# Altium PCB de10ext.PcbDoc
Units mm, origin at the board's own origin, x right, y up, seen from the top; angles counter-clockwise.
Board outline 120.47 x 75.46 mm, 4 copper layers (Sig/Pwr-1, Gnd-2, Gnd-3, Sig/Pwr-4), stack 1.57 mm thick; 81 components, 72 nets, 303 pads, 142 vias.
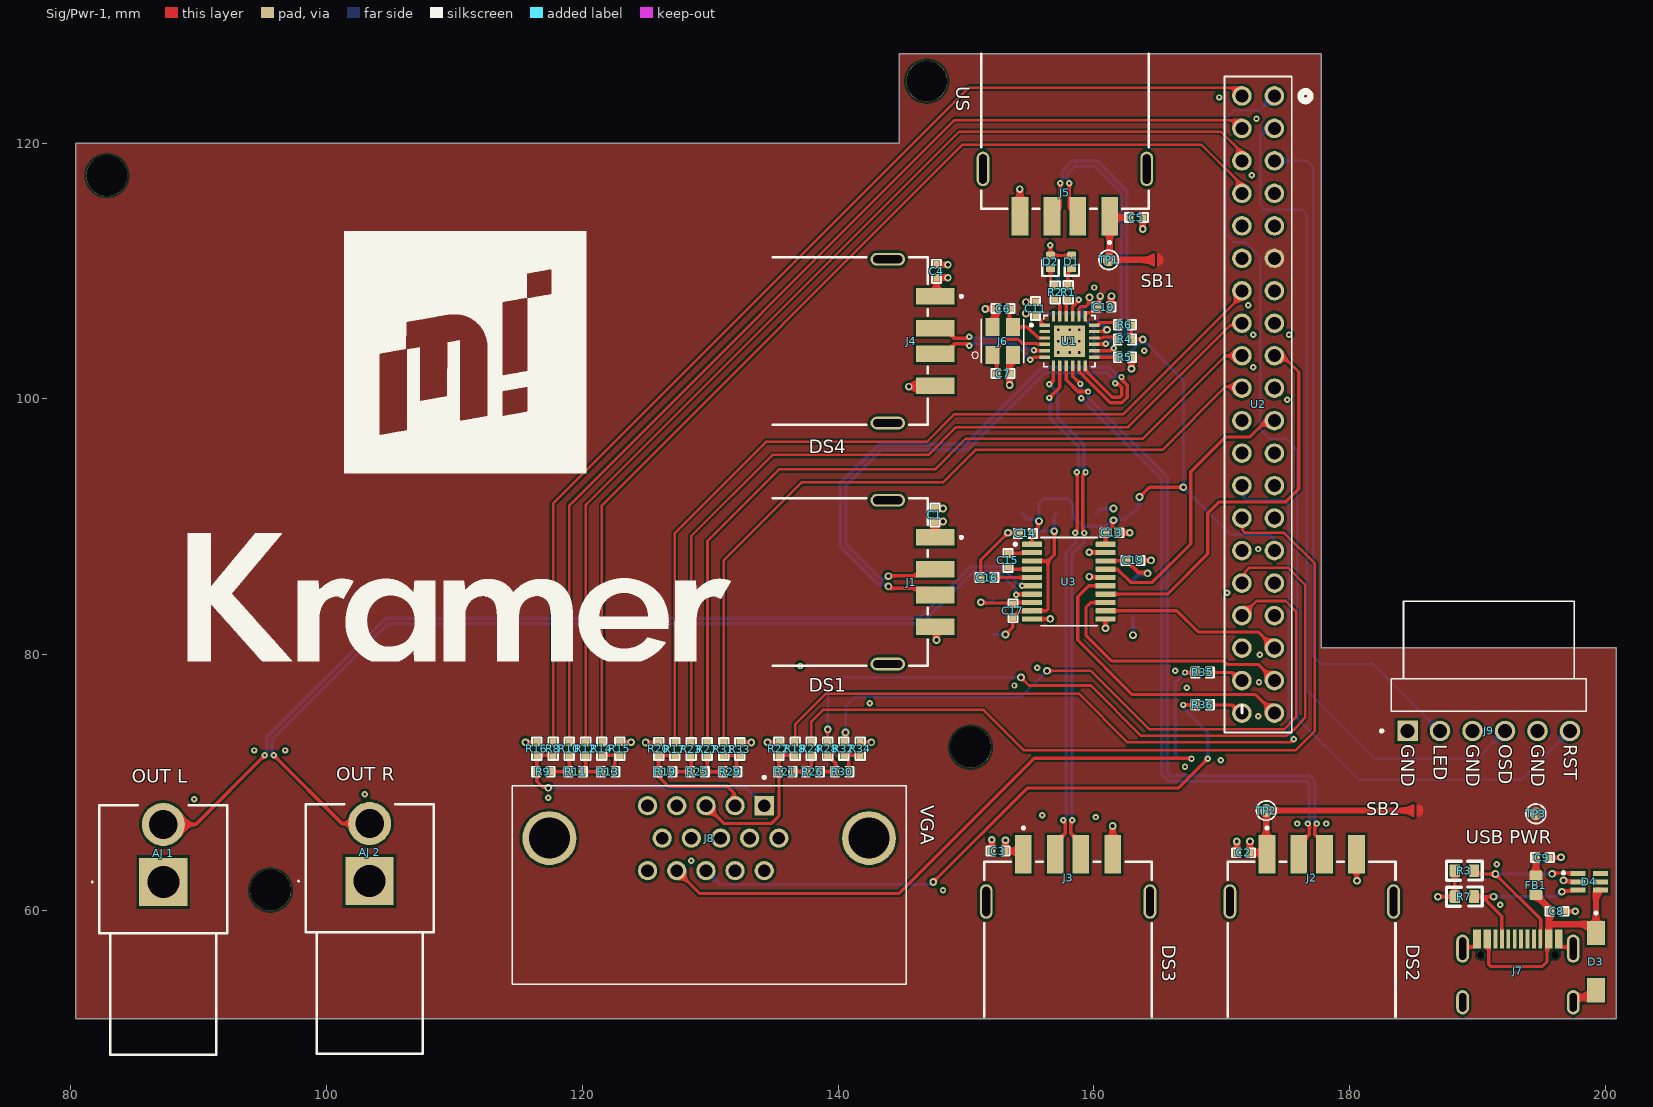
[diagram p0: Sig/Pwr-1 view]
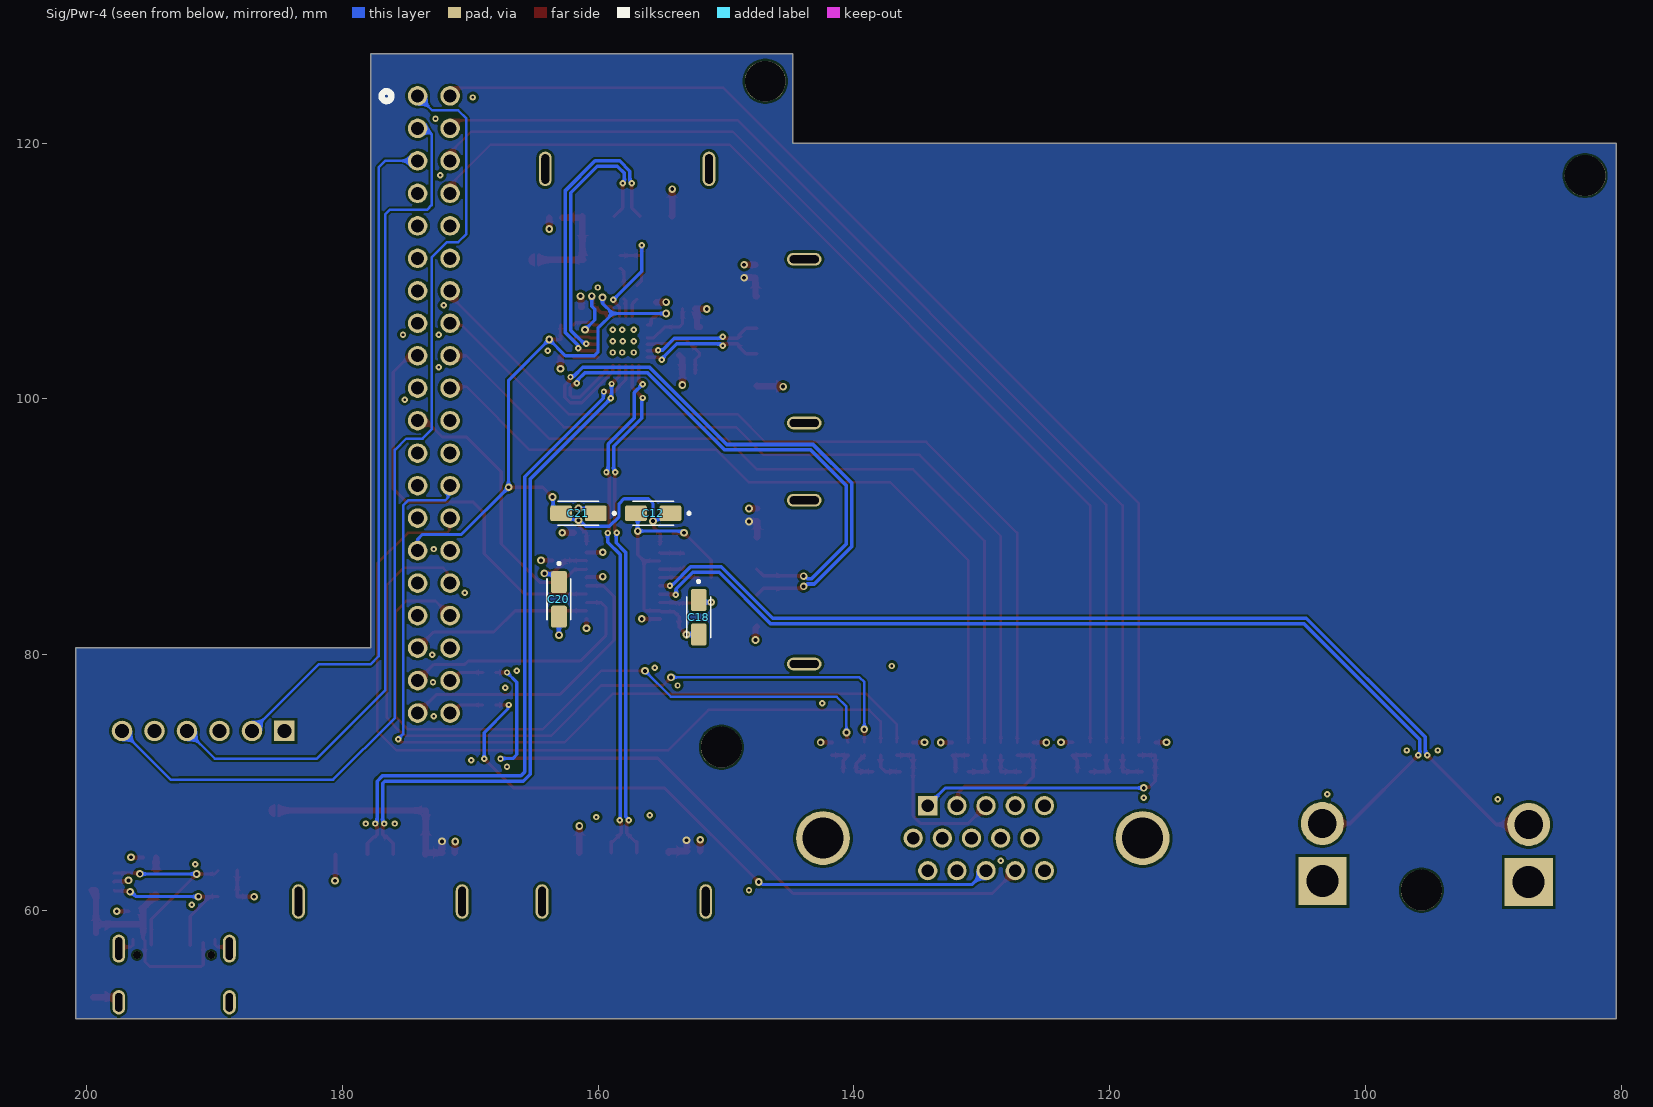
[diagram p1: Sig/Pwr-4 view, seen from below]
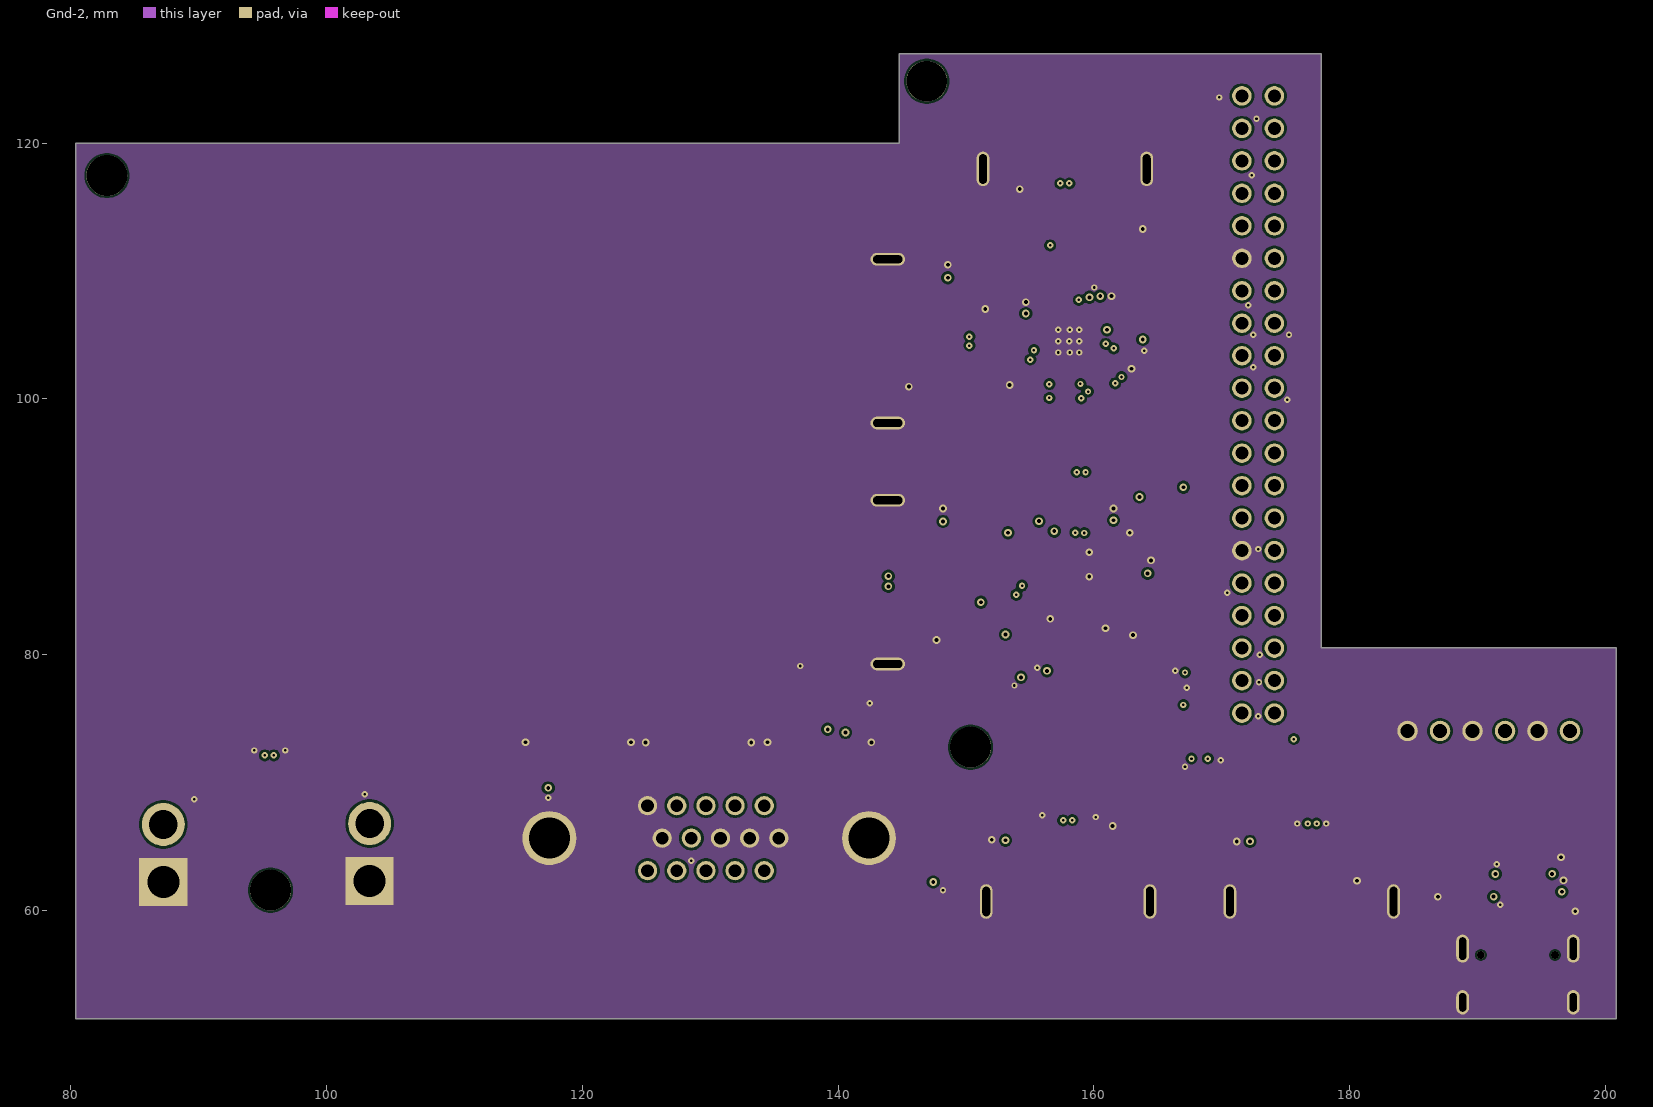
[diagram p2: Gnd-2]
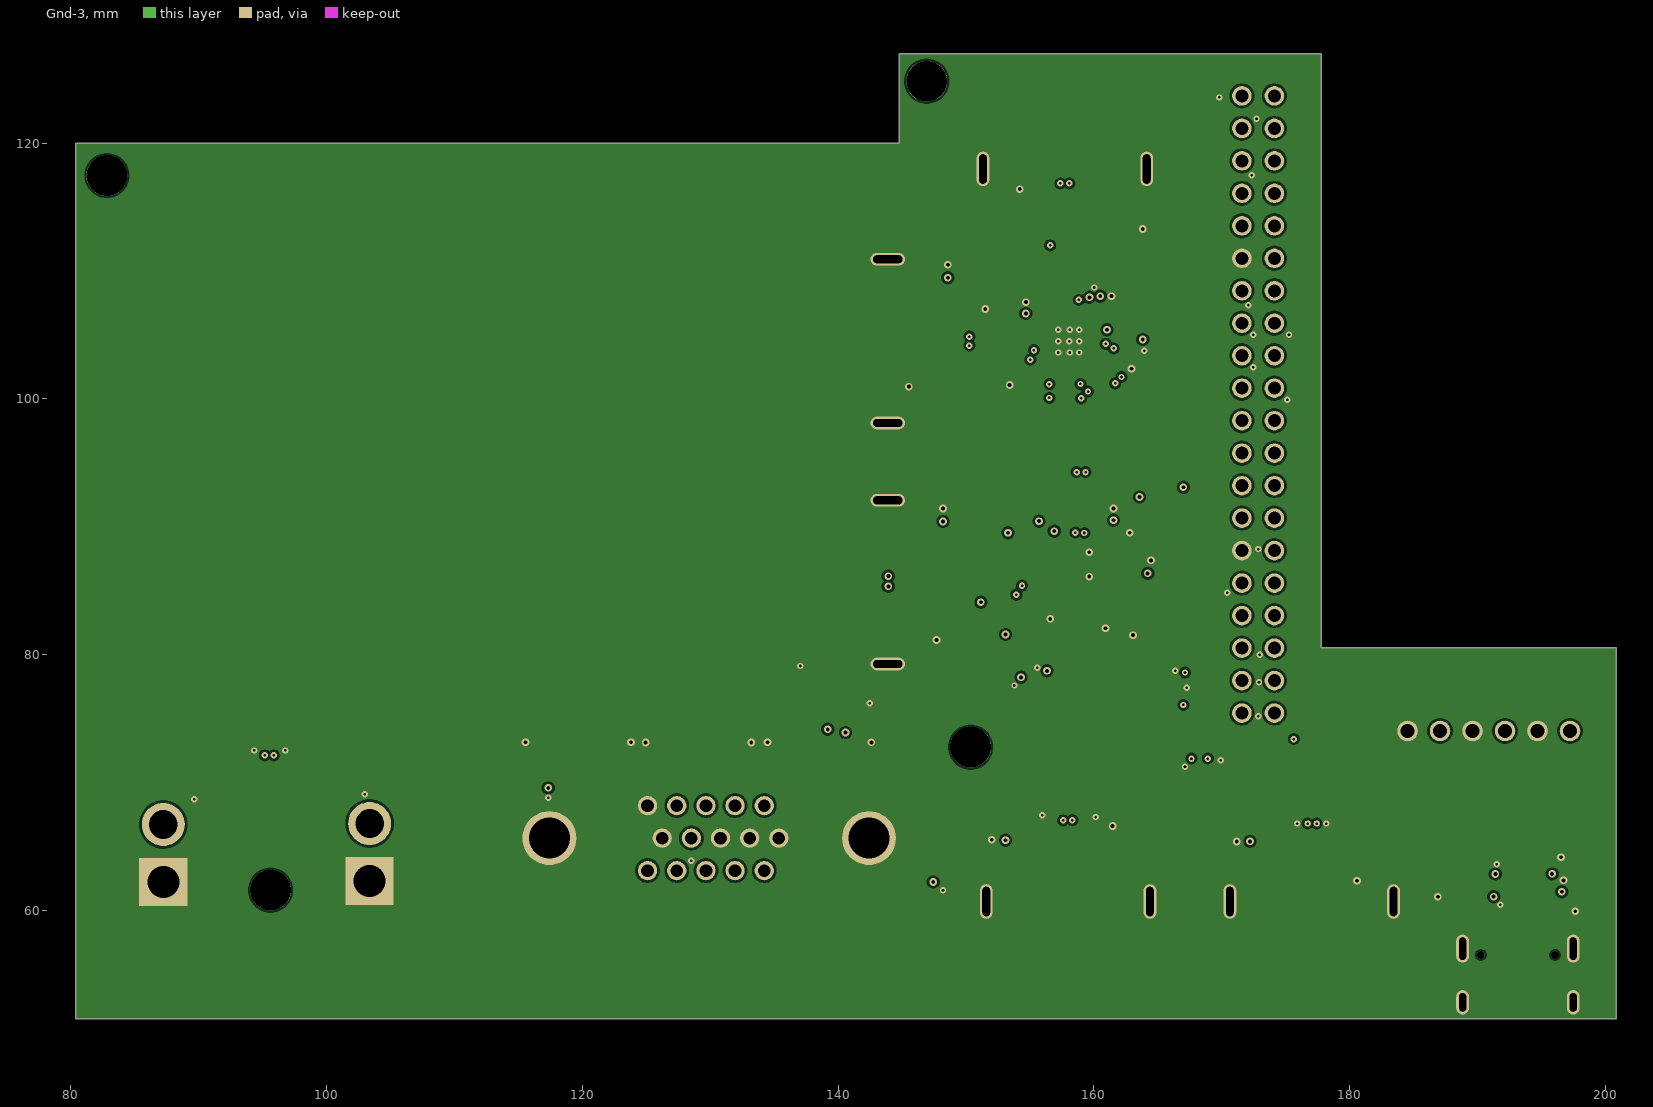
[diagram p3: Gnd-3]
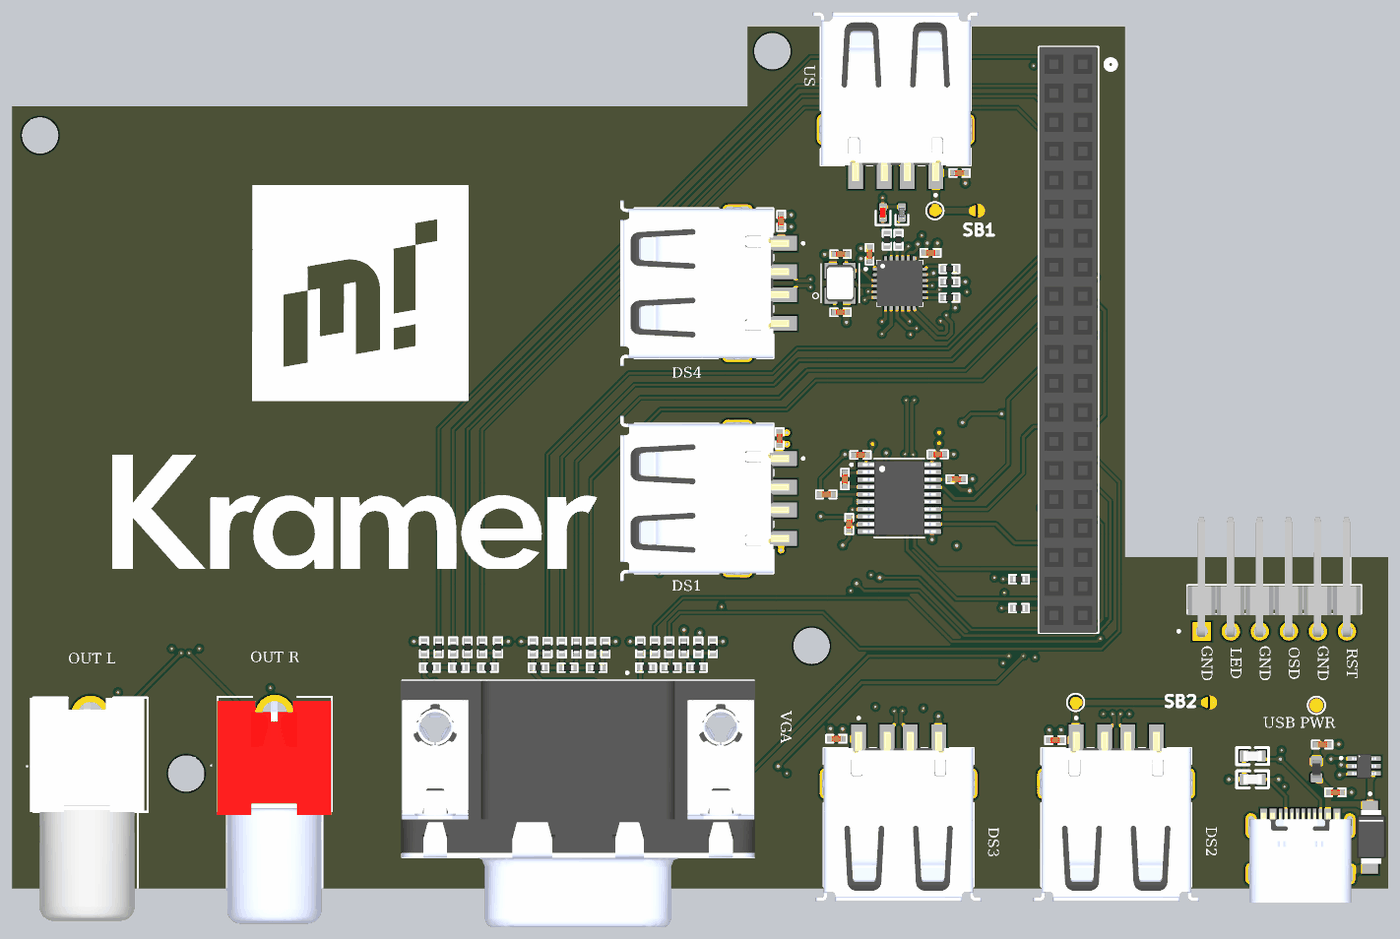
[diagram p4: 3D render of the assembled board from above, using the file's embedded part models]
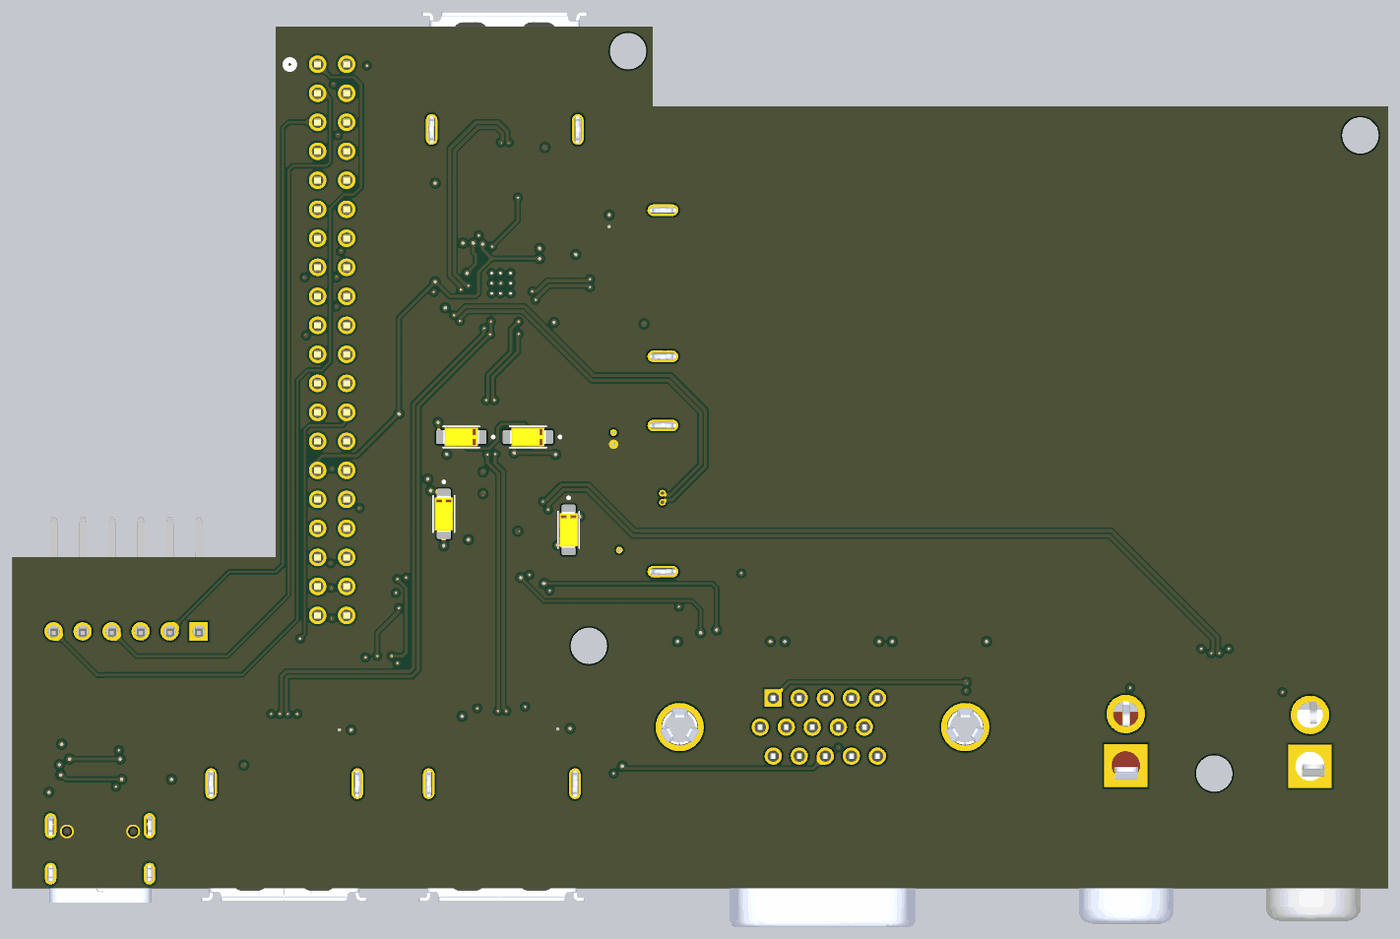
[diagram p5: 3D render of the assembled board from below, using the file's embedded part models]

## Layer stack, top to bottom
Top Solder: solder mask 0.0102, Solder Resist, Dk 3.5
Sig/Pwr-1: signal copper 0.035
Dielectric 2: prepreg 0.2, PP-006, Dk 4.1
Gnd-2: signal copper 0.0175
Dielectric 1: dielectric 1.065, FR-4, Dk 4.8
Gnd-3: signal copper 0.0175
Dielectric 3: prepreg 0.2, PP-006, Dk 4.1
Sig/Pwr-4: signal copper 0.035
Bottom Solder: solder mask 0.0102, Solder Resist, Dk 3.5

## Board outline
80.391,51.538 80.391,120.001 144.78,120.001 144.78,127 177.8,127 177.8,80.543 200.857,80.543 200.857,51.538

## Design rules (kind name [scope] priority, off if disabled: settings)
Clearance [All] p1: gap=0.15 ignorepadtopadclearanceinfootprint=TRUE except(0.18: SMDPad-THPad SMDPad-Via SMDPad-Fill SMDPad-Poly SMDPad-Region SMDPad-Text; 0.2: Arc-THPad Track-THPad THPad-THPad THPad-Via THPad-Fill THPad-Poly THPad-Region THPad-Text Via-Via Via-Fill Via-Poly Via-Region Text-Text)
DiffPairsRouting [All] p1: maxlimit=0.15 minlimit=0.127 mostfreqgap=0.15 toplayer_mingap=0.15 toplayer_minwidth=0.277 toplayer_maxwidth=0.277 toplayer_prefwidth=0.277 midlayer1_maxgap=0.127 midlayer1_prefgap=0.127 midlayer1_minwidth=0.15 midlayer1_maxwidth=0.15 midlayer1_prefwidth=0.15 midlayer2_maxgap=0.127 midlayer2_prefgap=0.127 midlayer2_minwidth=0.15 midlayer2_maxwidth=0.15 midlayer2_prefwidth=0.15 bottomlayer_mingap=0.15 bottomlayer_minwidth=0.277 bottomlayer_maxwidth=0.277 bottomlayer_prefwidth=0.277 impedanceprofiledriven=TRUE impedanceprofileid={E07BE2BB-1565-4406-B5A3-BADCCE4379CD} impedanceprofilevalue=90.000000 maxuncoupledlength=12.7
PlaneConnect [All] p1: planeconnectstyle=Direct reliefexpansion=0.508 reliefentries=4 reliefconductorwidth=0.254 reliefairgap=0.254
PolygonConnect [All] p1: connectstyle=Direct reliefconductorwidth=0.254 reliefentries=4 polygonreliefangle="90 Angle" airgapwidth=0.254
RoutingVias [All] p1: holewidth=0.5 width=0.8 viastyle="Through Hole" minholewidth=0.2 minwidth=0.5 maxholewidth=0.3 maxwidth=0.6
SolderMaskExpansion [All] p1: expansion=0.102 istentingtop=FALSE
SupplyNets "Schematic Supply Nets_6" [InNet('VUSB')] p1: voltage=0.000
SupplyNets "Schematic Supply Nets_5" [InNet('+VDS')] p2: voltage=0.000
SupplyNets "Schematic Supply Nets_3" [InNet('GND')] p3: voltage=0.000
SupplyNets "Schematic Supply Nets_2" [InNet('+3V3')] p4: voltage=0.000
SupplyNets "Schematic Supply Nets_1" [InNet('+VUS')] p5: voltage=0.000
SupplyNets "Schematic Supply Nets" [InNet('AGND')] p6: voltage=0.000
Width [All] p1: maxlimit=0.8 minlimit=0.15 preferedwidth=0.25
28 further rules are at their usual default settings.

## Classes and differential pairs
component class vga&audio: "AJ 1" "AJ 2" C12 C13 C14 C15 C16 C17 C18 C19 C20 C21 J9 R8 R9 R10 R11 R12 R13 R14 R15 R16 R17 R18 R19 R20 R21 R22 R23 R24 R25 R26 R27 R28 R29 R30 R31 R32 R33 R34 R35 R36 U2 U3
component class usbhub: C1 C2 C3 C4 C5 C6 C7 C8 C9 C10 C11 D1 D2 D3 D4 FB1 J1 J2 J3 J4 J5 J6 J7 R1 R2 R3 R4 R5 R6 R7 SB1 SB2 TP1 TP2 TP3 U1
differential pair US: +US_P -US_N
differential pair OUT: +OUT_P -OUT_N
differential pair DS4: +DS4_P -DS4_N
differential pair DS3: +DS3_P -DS3_N
differential pair DS2: +DS2_P -DS2_N
differential pair DS1: +DS1_P -DS1_N

## Components (designator, comment, footprint, x,y, rotation, side; value= is the part's Value field where it differs from the comment)
"AJ 1" "KLPX-0848A-2-W" KLPX0848A2W 87.249,62.23 r90 top locked
"AJ 2" "KLPX-0848A-2-R" KLPX0848A2R 103.378,62.302 r90 top locked
C1 "100n 50V" CAPC1005X04L 147.574,90.932 r270 top value=4.7µF
C2 "100n 50V" CAPC1005X04L 171.704,64.516 r0 top value=4.7µF
C3 "100n 50V" CAPC1005X04L 152.527,64.643 r0 top value=4.7µF
C4 "100n 50V" CAPC1005X04L 147.701,109.982 r270 top value=4.7µF
C5 "100n 50V" CAPC1005X04L 163.322,114.173 r180 top value=4.7µF
C6 "10p" CAPC1005X04L 152.908,107.061 r0 top value=4.7µF
C7 "10p" CAPC1005X04L 152.908,101.981 r180 top value=4.7µF
C8 "100n 50V" CAPC1005X04L 196.215,59.944 r0 top value=4.7µF
C9 "100n 50V" CAPC1005X04L 195.072,64.135 r0 top value=4.7µF
C10 "100n 50V" CAPC1005X04L 160.782,107.188 r180 top value=4.7µF
C11 "100n 50V" CAPC1005X04L 155.448,107.061 r270 top value=4.7µF
C12 "10u 16V" CAPMP3216X180N 155.702,91.059 r0 bottom
C13 "100n 50V" CAPC1005X04L 161.417,89.535 r0 top value=4.7µF
C14 "100n 50V" CAPC1005X04L 154.648,89.488 r0 top value=4.7µF
C15 "2u2 16V" CAPC1005X04L 153.289,87.376 r270 top value=4.7µF
C16 "2u2 16V" CAPC1005X04L 151.659,86.031 r180 top value=4.7µF
C17 "100n 50V" CAPC1005X04L 153.67,83.439 r270 top value=4.7µF
C18 "10u 16V" CAPMP3216X180N 152.146,82.931 r270 bottom
C19 "100n 50V" CAPC1005X04L 163.068,87.376 r0 top value=4.7µF
C20 "10u 16V" CAPMP3216X180N 163.068,84.328 r270 bottom
C21 "10u 16V" CAPMP3216X180N 161.544,91.059 r0 bottom
D1 "BLUE" LED_0402_BLUE 158.271,110.709 r270 top
D2 "RED" LED_0402_RED 156.62,110.709 r270 top
D3 "SS54F" DIOM5226X100N 199.263,56.007 r270 top
D4 "SMF24CT1G" SOT65P210X110-6N 198.736,62.245 r0 top
FB1 "BLM18AG601SN1D" FB_0603 194.564,61.976 r270 top
J1 "USB1046-GF" GCT_USB1046-GF-0190-L-B-A_REVB4 143.891,85.675 r270 top locked
J2 "USB1046-GF" GCT_USB1046-GF-0190-L-B-A_REVB4 177.038,60.706 r0 top locked
J3 "USB1046-GF" GCT_USB1046-GF-0190-L-B-A_REVB4 157.988,60.706 r0 top locked
J4 "USB1046-GF" GCT_USB1046-GF-0190-L-B-A_REVB4 143.891,104.521 r270 top locked
J5 "USB1046-GF" GCT_USB1046-GF-0190-L-B-A_REVB4 157.734,117.983 r180 top
J6 "ABM8-272-T3" ABM8-272-T3 152.87,104.521 r90 top
J7 "TYPE-C-31-M-12" TYPE-C-31-M-12 193.16,54.923 r0 top
J8 "ICD15S13E4GX00LF" AMPHENOL_ICD15S13E4GX00LF 129.928,65.659 r0 top locked
J9 "G801P302005EU" AMPHENOL_G801P302005EU 190.881,74.041 r0 top
R1 "510" RESC1005X04L 157.988,108.331 r270 top value=0R
R2 "510" RESC1005X04L 156.972,108.323 r270 top value=0R
R3 "5k1" RES_0603 188.976,63.119 r0 top
R4 "100k" RESC1005X04L 162.433,104.648 r0 top value=0R
R5 "2k7 1%" RESC1005X04L 162.433,103.251 r0 top value=0R
R6 "100k" RESC1005X04L 162.433,105.791 r0 top value=0R
R7 "5k1" RES_0603 188.976,61.087 r0 top
R8 "1k3" RESC1005X04L 117.721,72.645 r270 top value=0R
R9 "680R" RESC1005X04L 116.959,70.867 r180 top value=0R
R10 "1k3" RESC1005X04L 118.991,72.637 r270 top value=0R
R11 "680R" RESC1005X04L 119.499,70.867 r180 top value=0R
R12 "1k3" RESC1005X04L 120.261,72.645 r270 top value=0R
R13 "680R" RESC1005X04L 122.039,70.867 r180 top value=0R
R14 "1k3" RESC1005X04L 121.531,72.645 r270 top value=0R
R15 "1k3" RESC1005X04L 122.928,72.653 r90 top value=0R
R16 "680R" RESC1005X04L 116.451,72.645 r270 top value=0R
R17 "1k3" RESC1005X04L 127.246,72.628 r270 top value=0R
R18 "1k3" RESC1005X04L 136.644,72.644 r270 top value=0R
R19 "680R" RESC1005X04L 126.484,70.858 r180 top value=0R
R20 "680R" RESC1005X04L 125.976,72.636 r270 top value=0R
R21 "680R" RESC1005X04L 135.882,70.866 r180 top value=0R
R22 "680R" RESC1005X04L 135.374,72.644 r270 top value=0R
R23 "1k3" RESC1005X04L 128.516,72.628 r270 top value=0R
R24 "1k3" RESC1005X04L 137.914,72.644 r270 top value=0R
R25 "680R" RESC1005X04L 129.024,70.85 r180 top value=0R
R26 "680R" RESC1005X04L 138.041,70.866 r180 top value=0R
R27 "1k3" RESC1005X04L 129.786,72.628 r270 top value=0R
R28 "1k3" RESC1005X04L 139.184,72.644 r270 top value=0R
R29 "680R" RESC1005X04L 131.564,70.85 r180 top value=0R
R30 "680R" RESC1005X04L 140.327,70.866 r180 top value=0R
R31 "1k3" RESC1005X04L 131.056,72.628 r270 top value=0R
R32 "1k3" RESC1005X04L 140.454,72.644 r270 top value=0R
R33 "1k3" RESC1005X04L 132.326,72.628 r90 top value=0R
R34 "1k3" RESC1005X04L 141.724,72.644 r90 top value=0R
R35 "33R" RESC1005X04L 168.529,78.613 r180 top value=0R
R36 "33R" RESC1005X04L 168.529,76.073 r180 top value=0R
SB1 "Solderbridge" Solderbridge 164.846,110.871 r0 top
SB2 "Solderbridge" Solderbridge 185.166,67.818 r0 top
TP1 "Ø1.0mm,SMD" TP_SMD_D1.0mm 161.163,110.871 r90 top
TP2 "Ø1.0mm,SMD" TP_SMD_D1.0mm 173.482,67.818 r90 top
TP3 "Ø1.0mm,SMD" TP_SMD_D1.0mm 194.564,67.564 r90 top
U1 "FE1.1S-BQFN24B" QFN50P400X400X80-25N 158.093,104.521 r0 top locked
U2 "2223" 2223_ADA 171.577,123.698 r270 top locked
U3 "PCM5102APW" SOP65P640X120-20N 158.051,85.714 r0 top locked

## Footprints (in the part's own frame and the unit in brackets; to place one, negate y for a bottom-side part, rotate by r counter-clockwise, add the part's x,y. Pads: shape width x height; smd on the part's side, far side on the other; paste and mask are expansions set on the pad)
2223_ADA [mil]
  round 60 hole 40 paste-99999 mask+0: 1(0,100) 2(0,0) 3(100,100) 4(100,0) 5(200,100) 6(200,0) 7(300,100) 8(300,0) 9(400,100) 10(400,0) 11(500,100) 12(500,0) 13(600,100) 14(600,0) 15(700,100) 16(700,0) 17(800,100) 18(800,0) 19(900,100) 20(900,0) 21(1000,100) 22(1000,0) 23(1100,100) 24(1100,0) 25(1200,100) 26(1200,0) 27(1300,100) 28(1300,0) 29(1400,100) 30(1400,0) 31(1500,100) 32(1500,0) 33(1600,100) 34(1600,0) 35(1700,100) 36(1700,0) 37(1800,100) 38(1800,0) 39(1900,100) 40(1900,0)
  silkscreen extent -60,-54 1960,211, body extent -60,-48 1960,148, height 630
ABM8-272-T3 [mm]
  rect 1.4x1.1 smd: 1(-1.1,0.8) 2(-1.1,-0.8) 3(1.1,-0.8) 4(1.1,0.8)
  silkscreen extent -1.7,-1.66 1.7,2.4, body extent -1.6,-1.25 1.6,1.25, height 0.7
AMPHENOL_G801P302005EU [mm]
  rect 1.605x1.605 / inner round 1.605 / far side rect 1.605x1.605 hole 1.07 mask+0.102: 1(-6.35,0)
  round 1.605 hole 1.07 mask+0.102: 2(-3.81,0) 3(-1.27,0) 4(1.27,0) 5(3.81,0) 6(6.35,0)
  silkscreen extent -8.47,-0.1 7.62,10.14, body extent -7.65,-0.45 7.59,10.01, height 2.75
AMPHENOL_ICD15S13E4GX00LF [mm]
  rect 1.508x1.508 / inner round 1.508 / far side rect 1.508x1.508 hole 1: 1(4.305,2.54)
  round 1.508 hole 1: 2(2.025,2.54) 3(-0.255,2.54) 4(-2.535,2.54) 5(-4.815,2.54) 6(5.445,0) 7(3.165,0) 8(0.885,0) 9(-1.395,0) 10(-3.675,0) 11(4.305,-2.54) 12(2.025,-2.54) 13(-0.255,-2.54) 14(-2.535,-2.54) 15(-4.815,-2.54)
  round 4.216 hole 3.2: S1(-12.495,0) S2(12.495,0)
  silkscreen extent -15.41,-11.43 15.41,4.85, body extent -15.51,-17.53 15.5,4.05, height 12.55
CAPC1005X04L [mm]
  rect 0.6x0.5 smd: 1(-0.5,0) 2(0.5,0)
  silkscreen extent -0.9,-0.35 0.9,0.35, body extent -0.51,-0.25 0.51,0.25, height 0.5
CAPMP3216X180N [mm]
  rrect25% 1.71x1.23 smd: 1(-1.35,0) 2(1.35,0)
  silkscreen extent -2.9,-0.93 1.6,0.93, body extent -1.6,-0.8 1.6,0.8, height 1.8
DIOM5226X100N [mm]
  rect 1.89x1.38 smd: A(2.24,0) K(-2.24,0)
  silkscreen extent -3.91,-0.1 -3.71,0.1, body extent -2.4,-1.15 2.3,1.35, height 1.1
FB_0603 [mm]
  rrect25% 0.8x1 smd: 1(-0.75,0) 2(0.75,0)
  body extent -0.8,-0.4 0.8,0.4, height 0.81
GCT_USB1046-GF-0190-L-B-A_REVB4 [mm]
  rect 1.3x3 smd: 1(-3.5,3.7) 2(-1,3.7) 3(1,3.7) 4(3.5,3.7)
  oval 1x2.7 hole 0.6 slot 2.3 at 90 deg: SH1(-6.4,0) SH2(6.4,0)
  silkscreen extent -6.55,-9 6.55,5.85, body extent -7.25,-10.28 7.25,4.52, height 7.65
KLPX0848A2R [mm]
  rect 3.765x3.765 hole 2.51: 1(0,0)
  round 3.36 hole 2.24: 2(4.5,0)
  silkscreen extent -13.5,-5 6,5.6, body extent -13.85,-4.95 5.75,5.05, height 11.5
KLPX0848A2W [mm]
  rect 3.765x3.765 hole 2.51: 1(0,0)
  round 3.36 hole 2.24: 2(4.5,0)
  silkscreen extent -13.5,-5 6,5.6, body extent -13.52,-4.7 6.08,5.3, height 11.5
LED_0402_BLUE [mm]
  rrect25% 0.6x0.7 smd: A(-0.5,0) K(0.5,0)
  silkscreen extent 0.2,-0.55 1.07,0.56, body extent -0.51,-0.25 0.51,0.25, height 0.45
LED_0402_RED [mm]
  rrect25% 0.6x0.7 smd: A(-0.5,0) K(0.5,0)
  silkscreen extent -0.15,-0.65 1.1,0.65, body extent -0.51,-0.25 0.51,0.25, height 0.45
QFN50P400X400X80-25N [mm]
  rrect25% 0.84x0.26 smd: 1(-1.935,1.25) 2(-1.935,0.75) 3(-1.935,0.25) 4(-1.935,-0.25) 5(-1.935,-0.75) 6(-1.935,-1.25) 13(1.935,-1.25) 14(1.935,-0.75) 15(1.935,-0.25) 16(1.935,0.25) 17(1.935,0.75) 18(1.935,1.25)
  rrect25% 0.26x0.84 smd: 7(-1.25,-1.935) 8(-0.75,-1.935) 9(-0.25,-1.935) 10(0.25,-1.935) 11(0.75,-1.935) 12(1.25,-1.935) 19(1.25,1.935) 20(0.75,1.935) 21(0.25,1.935) 22(-0.25,1.935) 23(-0.75,1.935) 24(-1.25,1.935)
  rect 2.45x2.45 smd paste-2: 25(0,0)
  silkscreen extent -3.07,-2 2,2, body extent -2,-2 2,2, height 0.8
RES_0603 [mm]
  rrect25% 0.8x1 smd: 1(-0.75,0) 2(0.75,0)
  silkscreen extent -1.4,-0.75 1.39,0.74, body extent -0.8,-0.43 0.8,0.43, height 0.52
RESC1005X04L [mm]
  rect 0.6x0.55 smd mask+0.05: 1(-0.5,0) 2(0.5,0)
  silkscreen extent -0.87,-0.38 0.88,0.38, body extent -0.5,-0.25 0.5,0.25, height 0.3
Solderbridge [mil]
  round 1 smd paste+0: 1(-13.78,0) 2(13.78,0)
  Sig/Pwr-1 region: -7.49,19.36 -15.76,15.74 -21.55,8.8 -23.62,0 -23.62,0 -21.55,-8.79 -15.76,-15.74 -7.49,-19.36 -7.49,-19.36 -6.18,-19.31 -5.02,-18.71 -4.22,-17.68 -3.94,-16.4 -3.94,-16.4 -3.94,16.4 -4.22,17.68 -5.02,18.71 -6.18,19.31 -7.49,19.36
  Sig/Pwr-1 region: 7.49,-19.36 15.76,-15.74 21.55,-8.8 23.62,0 23.62,0 21.55,8.79 15.76,15.74 7.49,19.36 7.49,19.36 6.18,19.31 5.02,18.71 4.22,17.68 3.94,16.4 3.94,16.4 3.94,-16.4 4.22,-17.68 5.02,-18.71 6.18,-19.31 7.49,-19.36
SOP65P640X120-20N [mm]
  rrect25% 1.57x0.41 smd: 1(-2.87,2.925) 2(-2.87,2.275) 3(-2.87,1.625) 4(-2.87,0.975) 5(-2.87,0.325) 6(-2.87,-0.325) 7(-2.87,-0.975) 8(-2.87,-1.625) 9(-2.87,-2.275) 10(-2.87,-2.925) 11(2.87,-2.925) 12(2.87,-2.275) 13(2.87,-1.625) 14(2.87,-0.975) 15(2.87,-0.325) 16(2.87,0.325) 17(2.87,0.975) 18(2.87,1.625) 19(2.87,2.275) 20(2.87,2.925)
  silkscreen extent -4.29,-3.45 2.2,3.45, body extent -3.2,-3.25 3.2,3.25, height 1.2
SOT65P210X110-6N [mm]
  rect 1.17x0.4 smd: 1(-0.87,0.65) 2(-0.87,0) 3(-0.87,-0.65) 4(0.87,-0.65) 5(0.87,0) 6(0.87,0.65)
  silkscreen extent -2.11,0.61 -1.91,0.81, body extent -1.05,-1.07 1.05,1.07, height 1.1
TP_SMD_D1.0mm [mm]
  round 1 smd paste-5: 1(0,0)
  silkscreen extent -0.76,-0.76 0.76,0.76
TYPE-C-31-M-12 [mm]
  rect 0.6x1.5 smd mask+0.07: A1B12(-3.2,2.85) B1A12(3.2,2.85)
  rect 0.6x1.5 smd mask+0.14: A4B9(-2.4,2.85) B4A9(2.4,2.85)
  rect 0.3x1.5 smd mask+0.14: A5(-1.25,2.85) A6(-0.25,2.85) A7(0.25,2.85) A8(1.25,2.85) B5(1.75,2.85) B6(0.75,2.85) B7(-0.75,2.85) B8(-1.75,2.85)
  round 0.6 hole 0.6 unplated mask+0.3: MH(-2.9,1.6) MH(2.9,1.6)
  oval 1x1.9 hole 0.55 slot 1.45 at 90 deg mask+0.05: SH(-4.325,-2.1) SH(4.325,-2.1)
  oval 1x2.2 hole 0.55 slot 1.75 at 90 deg mask+0.05: SH(-4.325,2.1) SH(4.325,2.1)
  body extent -4.47,-4.65 4.47,3.25, height 3.32

## Part data
"AJ 1": "Description", Manufacturer_Name="KYCON, INC.", Manufacturer_Part_Number=KLPX-0848A-2-R, Copyright="Copyright (C) 2025 Ultra Librarian. All rights reserved.", RefDes=RefDes, Type=Type
"AJ 2": "Description", Manufacturer_Name="KYCON, INC.", Copyright="Copyright (C) 2025 Ultra Librarian. All rights reserved.", Manufacturer_Part_Number=KLPX-0848A-2-R, RefDes=RefDes, Type=Type
C1 C2 C3 C4 C5 C6 C7 C8 C9 C10 C11 C13 C14 C15 C16 C17 C19: library part C0402-4µ7, "Capacitor, X5R, ±20%", Manufacturer=N.A., Part number IPS="00000001251, 00000007165", Part number NEMS=100200193, Supplier Part Number 1=490-13252-1-ND, Artikkelnr Noca=20039482, Author=rsk, Component Class=Capacitors, Component Status=Active, ComponentLink1Description=Datasheet, ComponentLink1URL=N.A., ComponentLink2Description="Supplier link", ComponentLink2URL=N.A., Footprint Doc=0402, HelpURL=N.A., LatestRevisionDate=2017-11-09, Manufacturer Part Number=N.A., Note=10V, Pad Count=2, Part Number=C0402-4µ7, Part number Norautron=N.A., PartId=100200193, Published=2009-05-08, Supplier 1=Digi-Key, Supplier 2=N.A., Supplier Part Number 2=N.A.
C12 C18 C20 C21: library part TAJA106K016RNJ, "10 ÂµF Molded Tantalum Capacitors 16 V 1206 (3216 Metric) 3Ohm", Package=Package, Check_prices=https://www.snapeda.com/parts/TAJA106K016RNJ/Kyocera/view-part/?ref=eda, MF="KYOCERA AVX", MP=TAJA106K016RNJ, SnapEDA_Link=https://www.snapeda.com/parts/TAJA106K016RNJ/Kyocera/view-part/?ref=snap
D1: library part LED_0402_BLUE, "LED 0402 BLUE SMD"
D2: library part LED_0402_RED, "LED 0402 RED SMD"
D3: library part "Schottky Diode_3", "Schottky Diode SMD SMAF package"
D4: "Quint Uni-Directional TVS Diode, 100W, 6-Pin SC-88", Package="TSSOP-6 ProTek Devices", Availability="In Stock", Check_prices=https://www.snapeda.com/parts/SMF05C/Protek+Devices/view-part/?ref=eda, MF="ProTek Devices", MP=SMF05C, Price=None, SnapEDA_Link=https://www.snapeda.com/parts/SMF05C/Protek+Devices/view-part/?ref=snap
FB1: library part FB_0603, "Ferrite Bead SMD 0603"
J1 J2 J3 J4 J5: library part USB1046-GF-0190-L-B-A_REVB4, "USB-A (USB TYPE-A) USB 2.0 Receptacle Connector 4 Position Surface Mount, Through Hole", Package=None, Check_prices=https://www.snapeda.com/parts/USB1046-GF-0190-L-B-A/Global+Connector+Technology/view-part/?ref=eda, MF="Global Connector Technology", MP=USB1046-GF-0190-L-B-A, SnapEDA_Link=https://www.snapeda.com/parts/USB1046-GF-0190-L-B-A/Global+Connector+Technology/view-part/?ref=snap
J6: "12 MHz Â±30ppm Crystal 10pF 50 Ohms 4-SMD, No Lead", Package="SMD-4 Abracon", Check_prices=https://www.snapeda.com/parts/ABM8-272-T3/Abracon/view-part/?ref=eda, MF=ABRACON, MP=ABM8-272-T3, SnapEDA_Link=https://www.snapeda.com/parts/ABM8-272-T3/Abracon/view-part/?ref=snap
J7: "USB Type C Connector Horizontal SMT", Manufacturer="Koren Hroparts", Manufacturer Part Number=TYPE-C-31-M-12
J8: "Conn High Density D-Sub SKT 15 POS 2.28mm Solder RA Thru-Hole 15 Terminal 1 Port", Package=None, Availability="In Stock", Check_prices=https://www.snapeda.com/parts/ICD15S13E4GX00LF/LC/view-part/?ref=eda, MF=Amphenol, MP=ICD15S13E4GX00LF, Price=None, Purchase-URL=https://pricing.snapeda.com/search?q=ICD15S13E4GX00LF&ref=eda, SnapEDA_Link=https://www.snapeda.com/parts/ICD15S13E4GX00LF/LC/view-part/?ref=snap
J9: Package=None, Availability=Unavailable, MF="{'manufacturer': u'Amphenol ICC (Commercial Products)'}", MP=G801P302005EU, Price=None
R1 R2 R4 R5 R6 R8 R9 R10 R11 R12 R13 R14 R15 R16 R17 R18 R19 R20 R21 R22 R23 R24 R25 R26 R27 R28 R29 R30 R31 R32 R33 R34 R35 R36: library part R0402-0R, "Resistor, ±5%, 0.063W", Manufacturer=N.A., Part number IPS=00000007128, Part number NEMS=100100109, Supplier Part Number 1=146-9661, Artikkelnr Noca=27049000, Author=rsk, Component Class=Resistors, Component Status=Active, ComponentLink1Description=Datasheet, ComponentLink1URL=N.A., ComponentLink2Description="Supplier link", ComponentLink2URL=N.A., Footprint Doc=0402, HelpURL=N.A., LatestRevisionDate=2009-11-23, Manufacturer Part Number=N.A., Note="Chip Res 5%", Pad Count=2, Part Number=R0402-0R, Part number Norautron=N.A., PartId=100100109, Published=2009-05-08, Supplier 1=Farnell, Supplier 2=N.A., Supplier Part Number 2=N.A.
R3 R7: library part RES_0603, "Resistor SMD 0603"
SB1 SB2: Manufacturer=N.A., Part number NEMS=100500458, Artikkelnr Noca=N.A., Author=rsk, Component Class=Connectors, Component Status=Active, ComponentLink1Description=Datasheet, ComponentLink1URL=N.A., ComponentLink2Description="Supplier link", ComponentLink2URL=N.A., Footprint Doc=Solderbridge, HelpURL=N.A., LatestRevisionDate=2009-12-14, Manufacturer Part Number=N.A., Note=N.A., Pad Count=2, Part Number=Solderbridge, Part number IPS=N.A., Part number Norautron=N.A., PartId=100500458, Published=2009-12-14, Supplier 1=N.A., Supplier 2=N.A., Supplier Part Number 1=N.A., Supplier Part Number 2=N.A., System=Connector
TP1 TP2 TP3: library part TP_SMD_Ø1.0MM, "1.0mm circular SMD testpad", Manufacturer="Nordic Semiconductor", Manufacturer Part Number=N.A., Part number NEMS=100500475, Artikkelnr Noca=N.A., Author=rsk, Component Class=Connectors, Component Status=Active, ComponentLink1Description=Datasheet, ComponentLink1URL=N.A., ComponentLink2Description="Supplier link", ComponentLink2URL=N.A., Footprint Doc=TP_SMD_Ø1.0mm, HelpURL=N.A., LatestRevisionDate=2021-03-05, Note=N.A., Pad Count=1, Part Number=TP_SMD_Ø1.0MM, Part number IPS=N.A., Part number Norautron=N.A., PartId=100500475, Published=2013-06-11, Supplier 1=N.A., Supplier 2=N.A., Supplier Part Number 1=N.A., Supplier Part Number 2=N.A.
U1: "USB Hub USB 2.0 WQFN-24 Interface Controllers RoHS"
U2: "Description", Manufacturer_Name="Adafruit Industries", Copyright="Copyright (C) 2025 Ultra Librarian. All rights reserved.", Manufacturer_Part_Number=2223, RefDes=RefDes, Type=Type
U3: "2VRMS DirectPathâ„¢, DAC estÃ©reo de Ã¡udio de 112dB com interface PCM de 32 bits e 384kHz 20-TSSOP -25 a 85", Package="TSSOP-20 Texas Instruments", Availability="In Stock", Check_prices=https://www.snapeda.com/parts/PCM5102APW/Texas+Instruments/view-part/?ref=eda, MF="Texas Instruments", MP=PCM5102APW, Price=None, Purchase-URL=https://pricing.snapeda.com/search/part/PCM5102APW/?ref=eda, SnapEDA_Link=https://www.snapeda.com/parts/PCM5102APW/Texas+Instruments/view-part/?ref=snap

## Free pads (board coordinates)
  round 3.2 hole 3.2 unplated: 1(82.841,117.464) 2(146.939,124.841) 3(95.631,61.595) 4(150.368,72.771)

## Via types
v1: diameter 0.5, hole 0.2, Sig/Pwr-1 to Sig/Pwr-4, tented both sides, 79 vias
v2: diameter 0.6, hole 0.3, Sig/Pwr-1 to Sig/Pwr-4, tented both sides, 58 vias
v3: diameter 0.6, hole 0.3, Sig/Pwr-1 to Sig/Pwr-4, 5 vias

## Nets (pads, with @x,y where several pads share a name; then routed paths per layer and width w, separated by ;. In a path a pad name is that pad's centre, name@x,y a point inside that pad or via, vN(x,y) a via of type N, cw(c..) or ccw(c..) an arc to the next point about the centre after c; other vN are vias at no path point)
+3V3: C11.2 C12.1 C13.1 C14.2 C21.2 R4.2 R6.2 U1.1 U1.20 U2.29 U3.1 U3.20 | length 63.8
  Sig/Pwr-1 w0.25: v2(154.686,106.68) 154.746,106.62 155.389,106.62 C11.2 155.448,106.511 155.573,106.386 155.717,106.386 155.863,106.24 155.863,105.776 155.868,105.771 U1.1 ; U3.1 155.148,88.672 C14.2 155.198,89.488 155.645,89.935 155.645,90.378 v2(155.712,90.445) ; U1.20 158.843,107.077 158.99,107.224 159.347,107.224 159.6,107.477 159.6,107.877 v2(159.667,107.944) ; U3.20 160.917,88.643 C13.1 160.967,89.535 161.467,90.035 161.467,90.447 v2(161.534,90.514) ; R6.2 R4.2 v2(163.83,104.648) ; v2(163.576,92.329) 164.338,93.091 v2(167.005,93.091)
  Sig/Pwr-4 w0.25: C12.1 154.824,90.587 155.475,90.587 155.617,90.445 v2(155.712,90.445) 155.712,91.831 156.083,92.202 157.988,92.202 158.369,91.821 158.369,90.805 159.131,90.043 160.968,90.043 161.439,90.514 v2(161.534,90.514) 161.629,90.514 161.701,90.587 162.422,90.587 C21.2 163.035,91.059 163.523,91.547 163.523,92.276 v2(163.576,92.329) ; v2(154.686,106.68) 158.877,106.68 ; v2(159.667,107.944) 159.667,107.471 158.877,106.68 ; U2.29@174.117,88.773 174.117,89.027 173.736,89.408 170.688,89.408 v2(167.005,93.091) 167.005,101.473 v2(163.83,104.648) 162.56,103.378 160.293,103.378 160.02,103.651 160.02,105.537 158.877,106.68
+VDS: C1.2 C2.2 C3.2 C4.2 J1.1 J2.1 J3.1 J4.1 SB2.1 TP2.1 | length 23.9
  Sig/Pwr-1 w0.5: J1.1 147.574,89.192 C1.2 147.574,90.428 148.205,90.428 v3(148.209,90.424) ; J4.1 147.701,108.021 C4.2 148.59,109.482 v2(148.59,109.474) ; C3.2 C3.2@153.092,64.643 ; v2(153.092,65.497) C3.2@153.092,64.643 ; J3.1@154.488,64.533 154.488,64.643 C3.2@153.092,64.643 ; C2.2 C2.2@172.212,64.516 ; v2(172.212,65.405) C2.2@172.212,64.516 ; SB2.1 TP2.1 J2.1@173.482,64.516 ; C2.2@172.212,64.516 J2.1@173.482,64.516 ; J2.1@173.482,64.516 173.538,64.516 J2.1 173.482,64.406 J2.1@173.482,64.516
+VUS: C5.2 J5.1 SB1.1 TP1.1 | length 8.4
  Sig/Pwr-1 w0.5: J5.1@161.234,114.173 C5.2 ; J5.1 161.234,110.871 TP1.1 SB1.1
_H_SYNC: R36.1 U2.40 | length 2.8
  Sig/Pwr-1 w0.25: R36.1 170.811,76.073 171.446,75.438 U2.40
_V_SYNC: R35.1 U2.38 | length 2.8
  Sig/Pwr-1 w0.25: R35.1 170.811,78.613 171.446,77.978 U2.38
AGND: C12.2 C14.1 C16.2 C17.2 C18.2 U3.3 U3.9 | length 23.5
  Sig/Pwr-1 w0.25: C16.2 151.159,87.405 v2(153.289,89.535) 153.312,89.512 154.124,89.512 C14.1 ; v2(153.101,81.585) 153.67,82.154 C17.2 ; C17.2@153.67,82.989 154.04,83.359 155.101,83.359 U3.9 156.281,83.439 156.427,83.585 156.427,87.339 ; U3.3 156.427,87.339 ; v2(156.911,89.666) 156.911,87.823 156.427,87.339
  Sig/Pwr-4 w0.25: C18.2 152.15,81.585 v2(153.101,81.585) ; v2(153.289,89.535) 153.384,89.535 153.514,89.666 v2(156.911,89.666) 156.911,90.918 C12.2
AVDD: C17.1 C18.1 U3.8 | length 5.2
  Sig/Pwr-1 w0.25: v2(151.172,84.104) 151.239,84.037 153.572,84.037 C17.1 ; C17.1@153.67,83.964 153.795,84.089 U3.8
  Sig/Pwr-4 w0.25: v2(151.172,84.104) 151.969,84.104 C18.1
BCK: U2.37 U3.13 | length 20.1
  Sig/Pwr-1 w0.25: U3.13 160.906,84.074 159.766,84.074 159.385,83.693 159.385,81.534 161.417,79.502 170.18,79.502 170.434,79.248 172.847,79.248 U2.37
BUSJ: R6.1 U1.18 | length 2.1
  Sig/Pwr-1 w0.25: U1.18 160.318,105.771 160.532,105.985 161.714,105.985 161.908,105.791 R6.1
CC1: D4.3 J7.A5 R7.2 | length 12.8
  Sig/Pwr-1 w0.25: R7.2 190.373,61.087 ; v2(191.262,61.087) 190.373,61.087 ; J7.A5@191.897,57.266 191.897,59.563 190.373,61.087 ; v2(196.596,61.468) 196.659,61.531 197.802,61.531 D4.3
  Sig/Pwr-4 w0.25: v2(191.262,61.087) 196.12,61.087 196.501,61.468 v2(196.596,61.468)
CC2: D4.1 J7.B5 R3.2 | length 15.3
  Sig/Pwr-1 w0.25: R3.2 189.99,62.855 v2(191.397,62.855) 194.945,59.307 J7.B5@194.945,57.296 ; v2(195.834,62.865) 195.901,62.932 196.634,62.932 197.829,62.932 D4.1
  Sig/Pwr-4 w0.25: v2(191.397,62.855) 191.402,62.86 195.829,62.86 v2(195.834,62.865)
DIN: U2.17 U3.14 | length 32.2
  Sig/Pwr-1 w0.25: U3.14 165.765,84.739 168.91,87.884 168.91,91.059 169.799,91.948 175.006,91.948 176.022,92.964 176.022,102.108 U2.17@174.117,104.013
DRV: D1.A D2.A U1.21 | length 9.2
  Sig/Pwr-1 w0.25: v1(156.591,112.014) 156.605,112 156.605,111.223 D2.A D1.A ; U1.21 158.343,107.222 158.83,107.709 v1(158.83,107.743)
  Sig/Pwr-4 w0.25: v1(156.591,112.014) 156.591,109.982 v1(158.83,107.743)
DS1_N: J1.2 U1.12 | length 43.3
  Sig/Pwr-1 w0.277: v3(143.936,86.144) 143.955,86.164 147.08,86.164 J1.2 ; U1.12@159.343,102.305 159.343,102.251 161.454,100.141 162.018,100.141 162.181,100.303 162.181,100.667 162.184,100.669 162.184,100.899 161.906,101.176 161.714,101.176 v1(161.671,101.219)
  Sig/Pwr-4 w0.277: v3(143.936,86.144) 143.848,86.144 143.662,85.958 143.297,85.958 140.589,88.666 140.589,93.218 143.383,96.012 150.114,96.012 156.164,102.062 161.021,102.062 161.628,101.454 161.628,101.262 v1(161.671,101.219)
DS1_P: J1.3 U1.11 | length 47.2
  Sig/Pwr-1 w0.277: v3(143.936,85.344) 144.023,85.344 144.181,85.186 147.08,85.186 J1.3 ; U1.11 158.852,102.577 158.852,102.138 161.277,99.713 162.195,99.713 162.608,100.126 162.608,100.49 162.611,100.492 162.611,101.076 162.209,101.479 162.209,101.671 v1(162.166,101.714)
  Sig/Pwr-4 w0.277: v3(143.936,85.344) 143.848,85.344 143.662,85.53 143.12,85.53 140.162,88.489 140.162,93.395 143.206,96.439 149.937,96.439 155.987,102.489 161.198,102.489 161.931,101.757 162.123,101.757 v1(162.166,101.714)
DS2_N: J2.2 U1.10 | length 52.7
  Sig/Pwr-1 w0.277: U1.10 158.343,101.784 v1(158.956,101.171) ; J2.2 176.038,65.256 176.549,65.767 176.662,65.767 176.855,65.961 176.855,66.605 176.719,66.742 v1(176.719,66.802)
  Sig/Pwr-4 w0.277: v1(158.956,101.171) 158.956,100.245 158.967,100.234 158.967,100.084 159.053,99.999 165.308,93.744 165.308,70.658 165.862,70.104 176.693,70.104 176.855,69.942 176.855,66.999 176.719,66.862 v1(176.719,66.802)
  other v1: 159.01,100.042
DS2_P: J2.3 U1.9 | length 53.5
  Sig/Pwr-1 w0.277: U1.9 157.852,102.577 157.852,101.493 158.764,100.58 v1(159.549,100.578) v1(159.549,100.578) ; v1(177.419,66.802) 177.419,66.742 177.283,66.605 177.283,65.93 177.445,65.767 177.527,65.767 178.038,65.256 J2.3
  Sig/Pwr-4 w0.277: v1(159.549,100.578) 159.591,100.536 159.591,100.065 165.735,93.921 165.735,70.835 166.039,70.531 176.87,70.531 177.283,70.119 177.283,66.999 177.419,66.862 v1(177.419,66.802)
DS3_N: J3.2 U1.8 | length 40.1
  Sig/Pwr-1 w0.277: v1(156.526,100.076) 157.343,100.893 U1.8 ; J3.2@156.988,64.533 156.988,65.383 157.115,65.383 157.778,66.046 157.778,66.825 157.607,66.996 v1(157.607,67.056) ; v1(158.558,89.553) 158.558,89.613 158.72,89.776 158.72,94.057 158.697,94.08 158.697,94.238 v1(158.654,94.28)
  Sig/Pwr-4 w0.277: 156.591,99.82 156.591,98.496 158.79,96.297 158.79,94.477 158.654,94.341 v1(158.654,94.28) ; v1(157.607,67.056) 157.607,67.116 157.861,67.37 157.861,88.011 158.598,88.748 158.598,89.513 v1(158.558,89.553)
DS3_P: J3.3 U1.7 | length 40.4
  Sig/Pwr-1 w0.277: v1(156.528,101.155) 156.569,101.155 156.843,101.429 U1.7 ; v1(158.318,67.061) 158.318,67.001 158.205,66.888 158.205,66.053 158.477,65.782 158.477,65.767 158.861,65.383 158.988,65.383 J3.3@158.988,64.533 ; v1(159.258,89.518) 159.215,89.561 159.215,89.728 159.148,89.796 159.148,94.014 159.354,94.22 v1(159.354,94.28)
  Sig/Pwr-4 w0.277: v1(156.528,101.155) 157.183,100.5 157.183,98.508 159.218,96.474 159.218,94.477 159.354,94.341 v1(159.354,94.28) ; v1(158.318,67.061) 158.288,67.091 158.288,87.834 159.258,88.804 v1(159.258,89.518)
DS4_N: J4.2 U1.5 | length 9.5
  Sig/Pwr-1 w0.277: J4.2 148.441,105.521 148.952,105.01 148.952,104.897 149.115,104.735 150.077,104.735 150.213,104.871 v1(150.274,104.871) ; v1(155.321,103.81) 155.36,103.771 U1.5
  Sig/Pwr-4 w0.277: v1(150.274,104.871) 150.334,104.871 150.47,104.735 154.041,104.735 154.95,103.826 155.305,103.826 v1(155.321,103.81)
DS4_P: J4.3 U1.6 | length 9.7
  Sig/Pwr-1 w0.277: J4.3 148.441,103.521 148.952,104.032 148.952,104.145 149.115,104.307 150.077,104.307 150.213,104.171 v1(150.274,104.171) ; v1(155.036,103.075) 155.096,103.075 155.292,103.271 U1.6
  Sig/Pwr-4 w0.277: v1(150.274,104.171) 150.334,104.171 150.47,104.307 153.864,104.307 155.036,103.135 v1(155.036,103.075)
GND: "AJ 1.1" "AJ 2.1" C1.1 C2.1 C3.1 C4.1 C5.1 C6.1 C7.1 C8.2 C9.2 C10.1 C11.1 C13.2 C19.2 C20.2 C21.1 D3.A D4.2 J1.4 J1.SH1 J1.SH2 J2.4 J2.SH1 J2.SH2 J3.4 J3.SH1 J3.SH2 J4.4 J4.SH1 J4.SH2 J5.4 J5.SH1 J5.SH2 J6.2 J6.4 J7.A1B12 J7.B1A12 J7.SH J8.5 J8.6 J8.7 J8.8 J8.10 J8.S1 J8.S2 J9.1 J9.3 J9.5 R3.1 R5.2 R7.1 R15.2 R16.1 R20.1 R22.1 R33.2 R34.2 U1.25 U2.12 U2.30 U3.10 U3.11 U3.16 U3.19 | length 48.4
  Sig/Pwr-1 w0.25: J7.SH@188.835,57.023 188.96,57.148 189.785,57.148 189.96,57.323 J7.A1B12 ; J7.B1A12 196.36,57.323 196.535,57.148 197.36,57.148 J7.SH@197.485,57.023
  Sig/Pwr-1 w0.3: v2(115.562,73.153) 115.566,73.149 116.447,73.149 R16.1 ; R15.2 v2(123.817,73.153) ; v2(124.96,73.144) 125.968,73.144 R20.1 ; R33.2 132.334,73.136 133.207,73.136 v2(133.215,73.144) ; v2(134.485,73.152) 134.489,73.148 135.37,73.148 R22.1 ; R34.2 142.604,73.144 v2(142.607,73.147) ; U3.10 155.188,82.796 156.583,82.796 v2(156.591,82.804) ; v2(159.639,86.106) 159.673,86.072 160.887,86.072 U3.16 ; v2(159.639,88.011) 159.65,88 160.91,88 U3.19 ; v2(160.914,82.067) 160.921,82.073 U3.11 ; C19.2 v2(164.465,87.376) ; J2.4 180.538,62.371 v2(180.584,62.325) ; v2(186.904,61.074) 186.917,61.087 R7.1 R3.1 ; C9.2 196.499,64.135 v2(196.528,64.163) ; C8.2 196.718,59.947 197.636,59.947 v2(197.64,59.951) ; v2(196.723,62.357) 196.804,62.357 196.866,62.295 197.816,62.295 D4.2
  Sig/Pwr-1 w0.5: v2(145.542,100.965) 145.561,100.984 147.554,100.984 J4.4 ; C1.1 147.574,91.436 148.205,91.436 v3(148.209,91.44) ; J1.4 147.701,82.065 v3(147.701,81.153) ; C4.1 147.701,110.49 v2(148.59,110.49) ; v2(151.517,107.033) 151.517,107.061 C6.1 152.273,107.061 152.273,105.621 J6.4 ; v2(152.019,65.532) 152.027,65.532 C3.1 ; C7.1 153.412,101.981 153.412,101.096 v2(153.416,101.092) ; C7.1@153.416,101.981 153.416,103.167 J6.2 ; v2(154.214,116.405) 154.224,116.395 154.224,114.293 J5.4 ; v2(154.686,107.569) 154.69,107.565 155.448,107.565 C11.1 ; C10.1 161.332,107.188 161.332,107.957 161.384,108.008 v2(161.384,108.035) ; v2(161.471,66.611) 161.479,66.602 161.479,64.542 J3.4@161.488,64.533 ; C13.2 v2(162.814,89.535) ; R5.2 162.937,103.247 162.937,102.366 v2(162.941,102.362) ; C5.1 163.83,114.173 v2(163.83,113.284) ; v2(171.181,65.404) 171.204,65.404 C2.1 ; J7.SH@197.319,53.213 D3.A@199.471,53.213
  Sig/Pwr-4 w0.3: C21.1 160.54,91.405 161.509,91.405 v2(161.544,91.44) ; v2(163.068,81.534) C20.2
  other v1: 191.77,60.452 148.209,61.595 191.516,63.627 128.524,63.881 175.895,66.802 178.181,66.802 160.147,67.31 155.956,67.437 89.662,68.707 117.34,68.826 102.997,69.088 167.132,71.247 169.926,71.755 94.361,72.517 96.774,72.517 172.847,75.184 142.494,76.2 167.259,77.406 153.797,77.597 172.914,77.834 166.37,78.74 155.575,78.994 137.033,79.121 172.974,80.01 170.434,84.836 172.847,88.265 175.133,99.949 172.466,102.489 157.226,103.632 158.115,103.632 158.877,103.632 163.957,103.759 157.226,104.521 158.093,104.521 158.877,104.521 172.466,105.029 175.26,105.029 157.226,105.41 158.115,105.41 158.877,105.41 172.085,107.315 160.02,108.712 172.339,117.475 172.72,121.92 169.799,123.571
H_SYNC: J8.13 R36.2 | length 49.8
  Sig/Pwr-1 w0.25: v2(147.447,62.23) 154.789,69.572 166.6,69.572 v1(168.91,71.882) ; v1(167.005,76.073) R36.2
  Sig/Pwr-4 w0.25: J8.13 130.752,62.04 147.162,62.04 147.352,62.23 v2(147.447,62.23) ; v1(167.005,76.073) 167.053,76.025 167.053,75.771 168.91,73.914 v1(168.91,71.882)
IO_B0: R32.1 U2.34 | length 55.7
  Sig/Pwr-1 w0.2: R32.1 140.521,73.212 140.521,73.846 v2(140.589,73.914) ; v2(156.337,78.74) 159.766,78.74 164.279,74.227 164.338,74.168 174.873,74.168 175.826,75.12 175.826,83.381 175.006,84.201 172.72,84.201 U2.34@171.894,83.376 ; U2.34 U2.34@171.894,83.376 ; U2.34@171.577,83.693 U2.34@171.894,83.376 ; U2.34@172.19,83.08 U2.34@171.894,83.376
  Sig/Pwr-4 w0.2: v2(140.589,73.914) 140.589,75.946 141.357,76.714 154.311,76.714 v2(156.337,78.74)
IO_B1: R28.1 U2.32 | length 61.4
  Sig/Pwr-1 w0.2: R28.1 139.188,73.148 139.188,74.164 v2(139.192,74.168) ; v2(154.305,78.232) 154.94,77.597 159.766,77.597 163.703,73.66 175.05,73.66 175.641,74.134 ccw(c174.311,75.791) 175.898,74.379 176.53,75.088 176.53,85.471 175.216,86.785 172.129,86.785 171.81,86.466 171.81,85.831 U2.32
  Sig/Pwr-4 w0.2: v2(139.192,74.168) 139.192,77.851 139.573,78.232 v2(154.305,78.232)
IO_B2: R24.1 U2.28 | length 64.1
  Sig/Pwr-1 w0.2: R24.1 137.914,74.795 138.811,75.692 151.384,75.692 154.559,72.517 175.768,72.517 177.292,74.041 177.292,87.122 174.879,89.535 171.831,89.535 171.633,89.733 171.633,90.622 U2.28
IO_B3: R18.1 U2.26 | length 66.3
  Sig/Pwr-1 w0.2: R18.1 136.644,74.541 139.065,76.962 158.836,76.962 162.646,73.152 175.374,73.152 175.628,73.406 v1(175.641,73.406)
  Sig/Pwr-4 w0.2: U2.26 171.747,93.048 171.747,92.286 171.958,92.075 174.857,92.075 175.252,91.68 175.252,73.795 v1(175.641,73.406)
IO_G0: R31.1 U2.20 | length 60.4
  Sig/Pwr-1 w0.2: R31.1 131.056,87.368 137.16,93.472 148.209,93.472 150.749,96.012 165.354,96.012 170.307,100.965 171.069,100.965 U2.20@171.407,101.303
IO_G1: R27.1 U2.18 | length 63.5
  Sig/Pwr-1 w0.2: R27.1 129.794,73.136 129.794,88.9 135.382,94.488 147.574,94.488 149.987,96.901 163.83,96.901 170.307,103.378 170.965,103.378 171.344,103.756 U2.18@171.344,103.78
IO_G2: R23.1 U2.16 | length 67
  Sig/Pwr-1 w0.2: R23.1 128.524,73.136 128.524,89.281 134.874,95.631 147.066,95.631 149.225,97.79 162.687,97.79 170.645,105.748 171.154,105.748 U2.16@171.324,105.918 ; U2.16@171.324,105.792 U2.16@171.324,105.918 ; U2.16 U2.16@171.324,105.918 ; U2.16@171.577,106.553 171.324,106.3 U2.16@171.324,105.918
IO_G3: R17.1 U2.14 | length 69.4
  Sig/Pwr-1 w0.2: R17.1 127.246,89.527 134.366,96.647 146.939,96.647 149.098,98.806 162.306,98.806 171.577,108.077 U2.14@171.577,109.093
IO_R0: R14.1 U2.8 | length 81.6
  Sig/Pwr-1 w0.2: R14.1 121.531,91.686 149.733,119.888 168.402,119.888 U2.8@171.577,116.713
IO_R1: R12.1 U2.6 | length 82.7
  Sig/Pwr-1 w0.2: R12.1 120.261,91.704 120.378,91.821 120.396,91.821 149.479,120.904 169.926,120.904 U2.6@171.577,119.253
IO_R2: R10.1 U2.4 | length 83.6
  Sig/Pwr-1 w0.2: R10.1 118.991,91.686 149.098,121.793 U2.4@171.577,121.793
IO_R3: R8.1 U2.2 | length 86
  Sig/Pwr-1 w0.2: R8.1 117.721,91.813 150.241,124.333 U2.2@171.577,124.333
LDOO: C19.1 C20.1 U3.18 | length 5.3
  Sig/Pwr-1 w0.25: U3.18 160.939,87.358 C19.1@162.55,87.358
  Sig/Pwr-1 w0.3: C19.1@162.55,87.358 162.636,87.358 162.718,87.276 162.718,87.189 163.49,86.417 164.154,86.417 v2(164.211,86.36)
  Sig/Pwr-4 w0.3: C20.1 163.068,85.838 163.533,86.303 164.154,86.303 v2(164.211,86.36)
LED: J9.2 U2.5 | length 53.8
  Sig/Pwr-4 w0.2: U2.5 176.657,118.618 177.165,118.11 177.165,79.883 177.8,79.248 181.864,79.248 J9.2
LED1: R1.2 U1.22 | length 1.4
  Sig/Pwr-1 w0.25: U1.22 157.848,106.461 157.848,107.691 R1.2
LED2: R2.2 U1.23 | length 1.5
  Sig/Pwr-1 w0.25: R2.2 156.972,107.798 157.343,107.427 U1.23
LRCK: U2.39 U3.15 | length 23.6
  Sig/Pwr-1 w0.25: U3.15 159.603,85.389 158.75,84.536 158.75,81.153 163.022,76.881 172.674,76.881 U2.39
NetC15_1: C15.1 U3.2 | length 1.9
  Sig/Pwr-1 w0.25: C15.1 153.345,87.932 155.124,87.932 U3.2
NetC15_2: C15.2 U3.4 | length 2
  Sig/Pwr-1 w0.25: C15.2 153.289,86.826 153.426,86.689 U3.4
NetC16_1: C16.1 U3.5 | length 3
  Sig/Pwr-1 w0.25: C16.1 152.163,86.035 155.177,86.035 U3.5
NetD1_K: D1.K R1.1 | length 1.5
  Sig/Pwr-1 w0.25: R1.1 157.988,109.976 158.221,110.209 D1.K
NetD2_K: D2.K R2.1 | length 1.5
  Sig/Pwr-1 w0.25: D2.K 156.62,109.2 156.972,108.848 R2.1
NetR9_1: R9.1 R10.2 R11.2 | length 2.8
  Sig/Pwr-1 w0.277: R9.1 R11.2 118.995,70.871 118.995,72.133 R10.2
NetR11_1: R11.1 R12.2 R13.2 | length 2.9
  Sig/Pwr-1 w0.277: R11.1 R13.2 ; R11.1@120.024,70.867 120.261,71.104 R12.2
NetR13_1: R13.1 R14.2 R15.1 | length 2.8
  Sig/Pwr-1 w0.277: R14.2 121.535,72.149 122.924,72.149 R15.1 122.928,72.128 122.539,71.739 R13.1
NetR19_1: R19.1 R23.2 R25.2 | length 2.8
  Sig/Pwr-1 w0.277: R19.1 126.988,70.854 R25.2@128.52,70.854 ; R23.2 128.52,72.124 R25.2@128.52,70.854 ; R25.2@128.52,70.854 R25.2 R25.2@128.52,70.854
NetR21_1: R21.1 R24.2 R26.2 | length 2.6
  Sig/Pwr-1 w0.277: R21.1 R26.2 137.566,70.866 137.914,71.214 R24.2
NetR25_1: R25.1 R27.2 R29.2 | length 2.9
  Sig/Pwr-1 w0.277: R25.1 R29.2 ; R25.1@129.549,70.85 129.786,71.087 R27.2
NetR26_1: R26.1 R28.2 R30.2 | length 2.8
  Sig/Pwr-1 w0.277: R26.1 R30.2 139.827,71.501 139.345,71.983 139.32,71.983 139.184,72.119 R28.2
NetR29_1: R29.1 R31.2 R33.1 | length 2.7
  Sig/Pwr-1 w0.277: R31.2 R33.1 132.326,72.103 132.064,71.841 R29.1
NetR30_1: R30.1 R32.2 R34.1 | length 2.7
  Sig/Pwr-1 w0.277: R32.2@140.454,72.119 140.827,71.746 R30.1 ; R32.2 R34.1
OSD: J9.4 U2.3 | length 66.9
  Sig/Pwr-4 w0.2: U2.3@174.117,121.793 173.016,120.692 173.016,115.147 173.355,114.808 176.276,114.808 176.657,114.427 176.657,77.216 182.003,71.87 189.98,71.87 J9.4
OUT_N: "AJ 1.2" U3.6 | length 77.6
  Sig/Pwr-1 w0.277: 87.249,66.73 89.779,66.73 v1(95.185,72.136) ; v1(154.389,85.401) 154.395,85.395 155.175,85.395 U3.6
  Sig/Pwr-4 w0.277: v1(95.185,72.136) 95.185,72.196 95.321,72.333 95.321,73.537 104.635,82.85 146.35,82.85 150.368,86.868 152.781,86.868 154.137,85.512 154.217,85.512 154.329,85.401 v1(154.389,85.401)
OUT_P: "AJ 2.2" U3.7 | length 76.8
  Sig/Pwr-1 w0.277: v1(95.885,72.136) 101.219,66.802 103.378,66.802 ; v1(153.938,84.69) 153.974,84.727 155.168,84.727 U3.7
  Sig/Pwr-4 w0.277: v1(95.885,72.136) 95.885,72.196 95.749,72.333 95.749,73.36 104.812,82.423 146.527,82.423 150.545,86.441 152.604,86.441 153.895,85.149 153.895,84.733 v1(153.938,84.69)
RESET: J9.6 U2.1 | length 79.9
  Sig/Pwr-4 w0.2: U2.1 172.974,122.555 170.942,122.555 170.307,121.92 170.307,112.903 170.942,112.268 171.809,112.268 173.016,111.061 173.016,97.621 173.736,96.901 175.006,96.901 175.895,96.012 175.895,75.057 180.721,70.231 192.786,70.231 192.798,70.219 193.409,70.219 J9.6
REXT: R5.1 U1.13 | length 1.9
  Sig/Pwr-1 w0.25: U1.13 160.033,103.266 161.918,103.266 R5.1
SCK: U2.35 U3.12 | length 14.4
  Sig/Pwr-1 w0.25: U3.12 166.493,83.439 168.144,81.788 172.847,81.788 U2.35
US_N: J5.2 U1.15 | length 22.3
  Sig/Pwr-1 w0.277: v1(158.084,116.852) 158.084,114.933 J5.2 ; U1.15 160.037,104.28 160.898,104.28 v1(160.928,104.31)
  Sig/Pwr-4 w0.277: v1(158.084,116.852) 158.084,116.913 157.948,117.049 157.948,117.639 158.498,118.189 160.068,118.189 162.133,116.124 162.133,105.356 161.129,104.352 160.97,104.352 v1(160.928,104.31)
US_P: J5.3 U1.14 | length 24.6
  Sig/Pwr-1 w0.277: J5.3 157.384,114.933 v1(157.384,116.852) ; U1.14 161.32,103.771 161.498,103.95 v1(161.559,103.95)
  Sig/Pwr-4 w0.277: v1(157.384,116.852) 157.384,116.913 157.52,117.049 157.52,117.816 158.321,118.616 160.245,118.616 162.56,116.301 162.56,105.179 161.601,104.22 161.601,103.992 v1(161.559,103.95)
V_SYNC: J8.14 R35.2 | length 54.4
  Sig/Pwr-1 w0.25: J8.14 129.171,61.341 144.78,61.341 155.342,71.903 167.619,71.903 v1(167.64,71.882) ; v1(167.132,78.613) R35.2
  Sig/Pwr-4 w0.25: v1(167.132,78.613) 166.37,77.851 166.37,72.198 166.686,71.882 v1(167.64,71.882)
VBUS: C8.1 D3.K D4.4 FB1.2 J7.A4B9 J7.B4A9 | length 19.4
  Sig/Pwr-1 w0.25: J7.A4B9@190.885,57.506 190.885,55.772 191.031,55.626 195.072,55.626 195.435,55.989 195.435,56.782 195.435,57.648 J7.B4A9 ; J7.B4A9@195.58,57.773 J7.B4A9@195.58,58.293
  Sig/Pwr-1 w0.5: FB1.2 194.664,61.226 194.814,61.076 194.814,60.976 195.665,60.125 C8.1@195.665,59.944 ; J7.B4A9@195.58,58.293 195.58,58.937 ; C8.1@195.58,59.944 195.58,58.937 ; D3.K@199.013,58.819 198.896,58.937 195.58,58.937 ; D3.K 199.263,58.819 199.263,61.537 199.321,61.595 D4.4
VGA_BLUE: J8.3 R18.2 R21.2 R22.2 | length 12.6
  Sig/Pwr-1 w0.25: J8.3 131.058,66.814 134.815,66.814 135.382,67.38 R21.2
  Sig/Pwr-1 w0.277: R21.2 135.378,70.87 135.378,72.14 R22.2 R18.2
VGA_GREEN: J8.2 R17.2 R19.2 R20.2 | length 10.4
  Sig/Pwr-1 w0.277: R20.2 R20.2@125.98,72.132 ; R17.2 127.242,72.132 R20.2@125.98,72.132 ; J8.2 131.852,68.3 131.852,69.198 131.328,69.723 126.724,69.723 125.984,70.463 R19.2 125.98,70.862 R20.2@125.98,72.132
VGA_RED: J8.1 R8.2 R9.2 R16.2 | length 21.9
  Sig/Pwr-1 w0.277: v2(117.34,69.588) 117.297,69.631 116.925,69.631 116.459,70.097 R9.2 116.455,70.871 116.455,72.141 R16.2 R8.2
  Sig/Pwr-4 w0.25: v2(117.34,69.588) 132.844,69.588 J8.1
VUSB: C9.1 C10.2 FB1.1 SB1.2 SB2.2 TP3.1 U1.17 U1.19 U2.11 | length 7.6
  Sig/Pwr-1 w0.25: U1.19 159.343,106.746 159.348,106.751 159.795,106.751 160.232,107.188 160.31,107.188 160.435,107.313 160.435,107.973 v2(160.502,108.04) ; U1.17 161.036,105.271 v2(161.036,105.41)
  Sig/Pwr-1 w0.5: FB1.1@194.564,63.107 194.564,64.135 C9.1
  Sig/Pwr-4 w0.25: v2(160.502,108.04) 160.502,107.245 160.274,107.017 160.274,106.172 v2(161.036,105.41)
XIN: C7.2 J6.1 U1.4 | length 6.4
  Sig/Pwr-1 w0.25: C7.2 152.408,103.083 J6.1 152.07,103.571 153.145,104.646 154.084,104.646 154.395,104.335 155.538,104.335 155.597,104.276 156.153,104.276 U1.4
XOUT: C6.2 J6.3 U1.3 | length 4.4
  Sig/Pwr-1 w0.25: C6.2 153.408,105.883 J6.3 154.801,105.621 155.646,104.776 156.153,104.776 U1.3
XRSTJ: R4.1 U1.16 | length 2
  Sig/Pwr-1 w0.25: U1.16 160.033,104.776 160.652,104.776 160.71,104.835 161.721,104.835 161.908,104.648 R4.1
XSMT: U2.21 U3.17 | length 22.4
  Sig/Pwr-1 w0.25: U3.17 160.951,86.658 161.881,86.658 162.881,85.658 164.576,85.658 167.58,88.662 167.58,94.301 170.307,97.028 172.212,97.028 U2.21@174.117,98.933
pads on no net: D4.5 D4.6 J7.A6 J7.A7 J7.A8 J7.B6 J7.B7 J7.B8 J7.MH J8.4 J8.9 J8.11 J8.12 J8.15 U1.2 U1.24 U2.7 U2.9 U2.10 U2.13 U2.15 U2.19 U2.22 U2.23 U2.24 U2.25 U2.27 U2.31 U2.33 U2.36

## Polygon pours and split planes (outlines as drawn)
GND on Gnd-3 "GND_L03_P002" (solid, pour order 2): 80.391,120.002 80.391,51.538 200.859,51.538 200.859,80.543 177.8,80.543 177.8,127 144.781,127 144.781,120.001
GND on Gnd-2 "GND_L02_P001" (solid, pour order 1): 80.391,120.001 80.391,51.537 200.858,51.537 200.858,80.542 177.799,80.542 177.799,126.999 144.78,126.999 144.78,120
VUSB on Sig/Pwr-1 "VUSB_L01_P000" (solid, pour order 0): 80.391,120.001 80.391,51.537 200.858,51.537 200.858,80.543 177.8,80.543 177.8,127 144.78,127 144.78,120.001
+VDS on Sig/Pwr-4 "+VDS_L04_P003" (solid, pour order 3): 80.391,120.001 80.391,51.537 200.859,51.537 200.859,80.543 177.801,80.543 177.801,127 144.781,127 144.781,120.001

## Silkscreen, mask and mechanical layers (free items; w line width, h text height)
Top Overlay:
  drawing of 8 lines, arcs and shapes, not listed
  text "US" at 148.883,124.432 h1.8 r270
  text "DS4" at 137.696,95.416 h1.8
  text "DS1" at 137.696,76.747 h1.8
  text "GND" at 183.681,72.997 h1.8 r270
  text "LED" at 186.221,72.997 h1.8 r270
  text "GND" at 188.761,72.997 h1.8 r270
  text "OSD" at 191.301,72.997 h1.8 r270
  text "GND" at 193.841,72.997 h1.8 r270
  text "RST" at 196.381,72.997 h1.8 r270
  text "OUT R" at 100.789,69.777 h1.8
  text "OUT L" at 84.787,69.65 h1.8
  text "VGA" at 146.104,68.248 h1.8 r270
  text "USB PWR" at 189.072,64.861 h1.8
  text "DS2" at 184.062,57.376 h1.8 r270
  text "DS3" at 164.99,57.339 h1.8 r270
Mechanical 1:
  lines w0.254: 80.391,51.538 200.857,51.538 200.857,80.543 177.855,80.543 177.8,80.543 177.8,127 144.78,127 144.78,120.001 80.391,120.001 80.391,51.538

## Text inside footprints (layer, text, board x,y; h text height)
D1: Mechanical 13 "+" at 158.779,112.592 h0.5 r270
D2: Mechanical 13 "+" at 157.128,112.592 h0.5 r270
J1: Mechanical 13 "PCB EDGE" at 135.141,78.425 h0.81 r270
J2: Mechanical 13 "PCB EDGE" at 184.288,51.956 h0.81
J3: Mechanical 13 "PCB EDGE" at 165.238,51.956 h0.81
J4: Mechanical 13 "PCB EDGE" at 135.141,97.271 h0.81 r270
J5: Mechanical 13 "PCB EDGE" at 150.484,126.733 h0.81 r180
J8: Mechanical 13 "PCB EDGE" at 145.928,54.409 h1.02